# Altium PCB New PCB Design.PcbDoc
Units mil, origin at the board's own origin, x right, y up, seen from the top; angles counter-clockwise.
Board outline 6000 x 4000 mil, 2 copper layers (Top Layer, Bottom Layer); 36 components, 22 nets, 139 pads, 0 vias.
Unrouted connection lines stored in the file: 84.
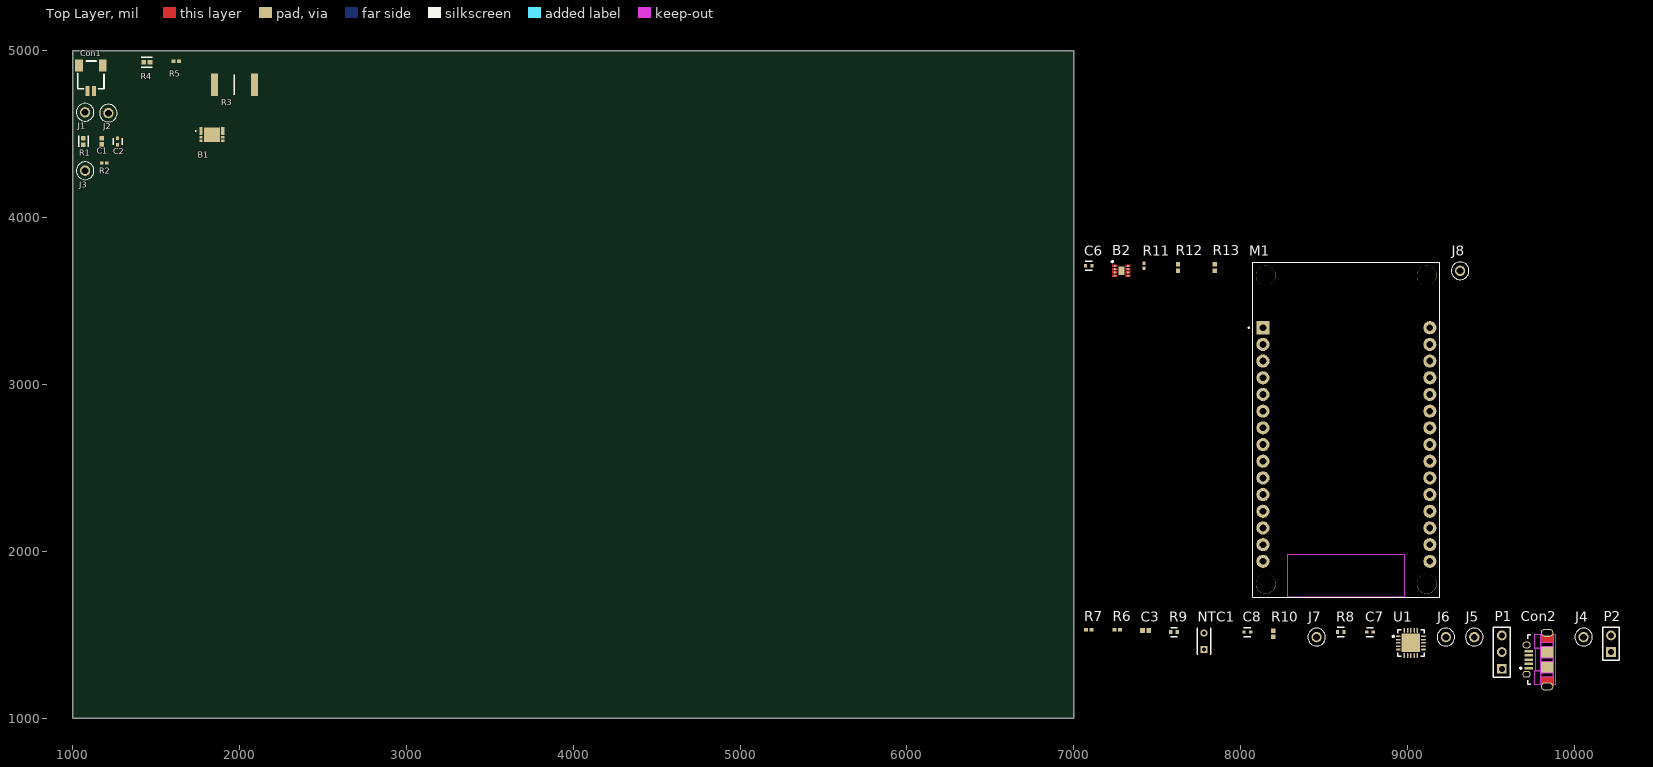
[diagram p0: Top Layer view]
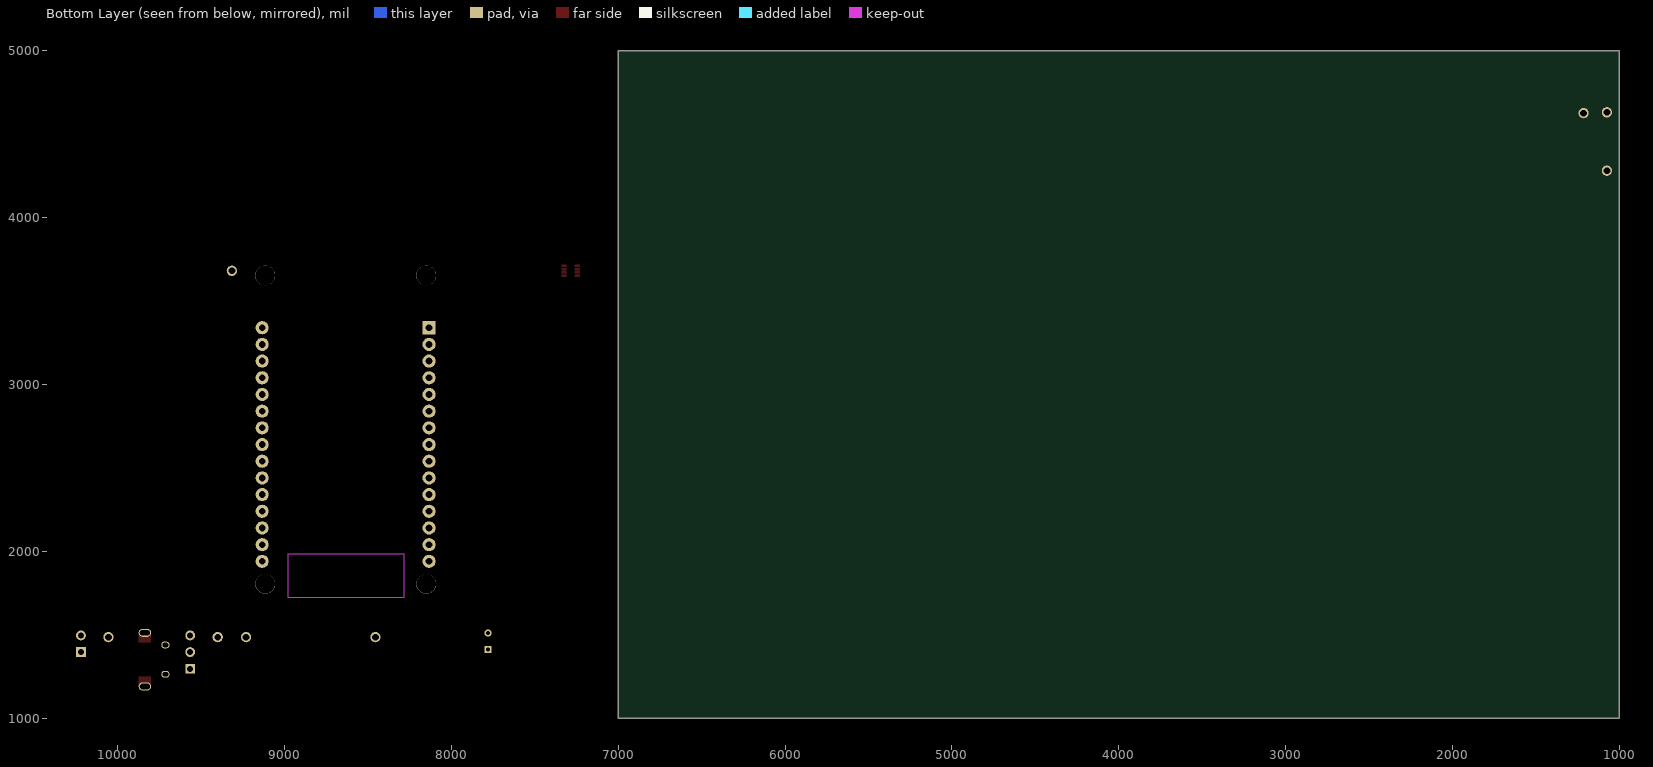
[diagram p1: Bottom Layer view, seen from below]

## Layer stack, top to bottom
Top Solder: solder mask 0.4, Solder Resist, Dk 3.5
Top Layer: signal copper 1.4
Dielectric 1: dielectric 12.6, FR-4, Dk 4.8
Bottom Layer: signal copper 1.4
Bottom Solder: solder mask 0.4, Solder Resist, Dk 3.5

## Board outline
1000,1000 7000,1000 7000,5000 1000,5000

## Design rules (kind name [scope] priority, off if disabled: settings)
Clearance [All] p1: gap=10 ignorepadtopadclearanceinfootprint=FALSE except(0: Arc-Hole Track-Hole SMDPad-Hole THPad-Hole Via-Hole Fill-Hole Poly-Hole Region-Hole Text-Hole)
PolygonConnect [All] p1: connectstyle=Relief reliefconductorwidth=10 reliefentries=4 polygonreliefangle="90 Angle" airgapwidth=10
RoomDefinition Battery_Monitor [InComponentClass('Battery_Monitor')] p1: confinementstyle=ConfineIn formatcopy=TRUE lockcomponents=FALSE outline 7045,1705 9385,1705 9385,3850 7045,3850
RoomDefinition Battery_Charger [InComponentClass('Battery_Charger')] p2: confinementstyle=ConfineIn formatcopy=TRUE lockcomponents=FALSE outline 7045,1060 10295,1060 10295,1655 7045,1655
RoutingVias [All] p1: holewidth=28 width=50 viastyle="Through Hole" minholewidth=28 minwidth=50 maxholewidth=28 maxwidth=50
SolderMaskExpansion [All] p1: expansion=4
Width "Schematic Width Constraint" [InNet('NetC3_2')] p1: maxlimit=36 minlimit=12 preferedwidth=20
Width "Schematic Width Constraint_9" [InNet('VBATT_2')] p2: maxlimit=36 minlimit=12 preferedwidth=20
Width "Schematic Width Constraint_7" [InNet('NetB1_3')] p3: maxlimit=36 minlimit=12 preferedwidth=20
Width "Schematic Width Constraint_6" [InNet('NetB1_1')] p4: maxlimit=36 minlimit=12 preferedwidth=20
Width "Schematic Width Constraint_5" [InNet('BATT+_1')] p5: maxlimit=36 minlimit=12 preferedwidth=20
Width "Schematic Width Constraint_4" [InNet('GND')] p6: maxlimit=36 minlimit=12 preferedwidth=20
Width "Schematic Width Constraint_3" [InNet('BATT+_1')] p7: maxlimit=36 minlimit=12 preferedwidth=20
Width "Schematic Width Constraint_2" [InNet('BATT-')] p8: maxlimit=36 minlimit=12 preferedwidth=20
Width [All] p9: maxlimit=10 minlimit=10 preferedwidth=10
30 further rules are at their usual default settings.

## Classes and differential pairs
component class Battery_Prtection: B1 C1 C2 Con1 J1 J2 J3 R1 R2 R3 R4 R5
component class Battery_Monitor: B2 C6 J8 M1 R11 R12 R13
component class Battery_Charger: C3 C7 C8 Con2 J4 J5 J6 J7 NTC1 P1 P2 R6 R7 R8 R9 R10 U1

## Components (designator, comment, footprint, x,y, rotation, side; value= is the part's Value field where it differs from the comment)
B1 "AP9214L-AH-HSB-7" AP9214LAHHSB7 1834.96,4495.75 r270 top
B2 "MAX17048G+T10" SON50P200X200X80-9N-D 7285,3680 r0 top
C1 "10uF" CAPC1005X70N 1175,4455 r270 top
C2 "0.1uF" FP-CC0402-MFG 1270,4455 r90 top
C3 "10uF" CAPC1005X70N 7430,1525 r0 top
C6 "0.1uF" FP-CC0402-MFG 7090,3710 r0 top
C7 "4.7 uF" FP-CC0402-MFG 8775,1515 r0 top
C8 "4.7 uF" FP-CC0402-MFG 8040,1515 r0 top
Con1 "SM02B-SRSS-TB(LF)(SN)" SM02B-SRSS-TB(LF)(SN) 1110,4835 r180 top
Con2 "ZX62D-AB-5P8" HIRO-ZX62D-AB-5P8_V 9775,1350 r90 top
J1 "5004" FP-5004-MFG 1075,4630 r0 top
J2 "5004" FP-5004-MFG 1215,4625 r0 top
J3 "5004" FP-5004-MFG 1075,4280 r0 top
J4 "5004" FP-5004-MFG 10055,1485 r0 top
J5 "5004" FP-5004-MFG 9400,1485 r0 top
J6 "5004" FP-5004-MFG 9230,1485 r0 top
J7 "5004" FP-5004-MFG 8455,1485 r0 top
J8 "5004" FP-5004-MFG 9315,3680 r0 top
M1 "ESP32-WROOM-32" ESP32-DEVKIT-V1 8610,2735 r0 top
NTC1 "NTC 10K Radial Leaded" FP-NXR_151B030-MFG 7780,1460 r90 top
P1 "Header 3" HDR1X3 9565,1295 r90 top
P2 "Header 2" HDR1X2 10220,1395 r90 top
R1 "0R" FP-RC0402-0_4-IPC_A 1065,4455 r90 top
R2 "402Ω" RESC1005X40X25LL05T10 1190,4325 r180 top value=402O
R3 "110mΩ" RESC6432X65N 1970,4795 r0 top value=110mO
R4 "0R" FP-RC0402-0_4-IPC_A 1445,4930 r0 top
R5 "2.61kΩ" RESC1005X40X25NL05T10 1621.73,4935 r0 top value=2.61kO
R6 "100K" RESC1005X40X25NL05T10 7260,1530 r0 top
R7 "2.61kΩ" RESC1005X40X25NL05T10 7090,1530 r0 top value=2.61kO
R8 "205Ω" FP-RT0402-MFG 8600,1515 r0 top value=205O
R9 "187kR" FP-AC0402-MFG 7600,1515 r0 top
R10 "2.2kR" RESC1005X40X25ML05T10 8195,1505 r90 top
R11 "10kR" RESC1005X40X25LL05T10 7420,3710 r90 top
R12 "2.2kR" RESC1005X40X25ML05T10 7625,3700 r90 top
R13 "2.2kR" RESC1005X40X25ML05T10 7845,3700 r90 top
U1 "MCP73871T-2CCI/ML" FP-C04-126-IPC_C 9020,1450 r0 top

## Footprints (in the part's own frame and the unit in brackets; to place one, negate y for a bottom-side part, rotate by r counter-clockwise, add the part's x,y. Pads: shape width x height; smd on the part's side, far side on the other; paste and mask are expansions set on the pad)
AP9214LAHHSB7 [mm]
  rect 1.2x0.5 smd: 1(-0.55,-1.65) 6(-0.55,1.65)
  rect 0.4x0.5 smd: 2(0.4,-1.65) 3(0.95,-1.65) 4(0.95,1.65) 5(0.4,1.65)
  rect 2.21x2.4 smd: 7(0,0)
  silkscreen extent -0.6,-2.5 -0.5,-2.4, body extent -1.25,-1.75 1.25,1.75, height 0.7
CAPC1005X70N [mm]
  rect 0.69x0.72 smd: 1(-0.46,0) 2(0.46,0)
  body extent -0.5,-0.25 0.5,0.25, height 0.7
ESP32-DEVKIT-V1 [mm]
  rect 2x2 hole 1.02: 1(-12.098,15.341)
  round 2 hole 1.02: 2(-12.098,12.801) 3(-12.098,10.261) 4(-12.098,7.721) 5(-12.098,5.181) 6(-12.098,2.641) 7(-12.098,0.101) 8(-12.098,-2.439) 9(-12.098,-4.979) 10(-12.098,-7.519) 11(-12.098,-10.059) 12(-12.098,-12.599) 13(-12.098,-15.139) 14(-12.098,-17.679) 15(-12.098,-20.219) 16(13.302,-20.219) 17(13.302,-17.679) 18(13.302,-15.139) 19(13.302,-12.599) 20(13.302,-10.059) 21(13.302,-7.519) 22(13.302,-4.979) 23(13.302,-2.439) 24(13.302,0.101) 25(13.302,2.641) 26(13.302,5.181) 27(13.302,7.721) 28(13.302,10.261) 29(13.302,12.801) 30(13.302,15.341)
  round 3 hole 3 unplated: ""(-11.678,-23.649) ""(-11.678,23.301) ""(12.832,-23.649) ""(12.832,23.301)
  Keep-Out Layer region: 9.382,-25.649 -8.308,-25.649 -8.308,-19.159 9.382,-19.159
  Keep-Out Layer region: 9.382,-25.649 -8.308,-25.649 -8.308,-19.159 9.382,-19.159
  Keep-Out Layer region: 9.382,-25.649 -8.308,-25.649 -8.308,-19.159 9.382,-19.159
  silkscreen extent -14.35,-25.65 14.83,25.3, body extent -13.5,-25.63 15,25.3, height 7.2
FP-5004-MFG [mm]
  round 1.57 hole 1.02 paste-1000 mask+0: 1(0,0)
  silkscreen extent -1.35,-1.34 1.35,1.34, body extent -1.45,-1.45 1.45,1.45, height 0.25
FP-AC0402-MFG [mm]
  rect 0.5x0.6 smd paste+0 mask+0: 1(-0.5,0) 2(0.5,0)
  silkscreen extent -0.5,-0.67 0.5,0.67, body extent -0.85,-0.4 0.85,0.4, height 0.25
FP-C04-126-IPC_C [mm]
  rect 0.729x0.239 smd paste+0 mask+0: 1(-1.915,1)
  rrect100% 0.729x0.239 smd paste+0 mask+0: 2(-1.915,0.5) 3(-1.915,0) 4(-1.915,-0.5) 5(-1.915,-1) 11(1.915,-1) 12(1.915,-0.5) 13(1.915,0) 14(1.915,0.5) 15(1.915,1)
  rrect100% 0.239x0.729 smd paste+0 mask+0: 6(-1,-1.915) 7(-0.5,-1.915) 8(0,-1.915) 9(0.5,-1.915) 10(1,-1.915) 16(1,1.915) 17(0.5,1.915) 18(0,1.915) 19(-0.5,1.915) 20(-1,1.915)
  rect 2.8x2.8 smd paste-1000 mask+0: 21(0,0)
  silkscreen extent -2.8,-2 2,2, body extent -2.38,-2.38 2.38,2.38, height 0.25
FP-CC0402-MFG [mm]
  rect 0.5x0.5 smd paste+0 mask+0: 1(-0.5,0) 2(0.5,0)
  silkscreen extent -0.53,-0.68 0.53,0.67, body extent -0.87,-0.48 0.87,0.48, height 0.25
FP-NXR_151B030-MFG [mm]
  rect 1.1x1.1 hole 0.6 paste-1000 mask+0: 1(-1.25,0)
  round 1.1 hole 0.6 paste-1000 mask+0: 2(1.25,0)
  silkscreen extent -2,-1 2,1, body extent -2.1,-1.1 2.1,1.1, height 0.25
FP-RC0402-0_4-IPC_A [mil]
  rect 28.16x26.48 smd paste+0 mask+0: 1(-18.84,0) 2(18.84,0)
  silkscreen extent -33,-29 33,29, body extent -41,-21 41,21, height 10
FP-RT0402-MFG [mm]
  rect 0.5x0.6 smd paste+0 mask+0: 1(-0.5,0) 2(0.5,0)
  silkscreen extent -0.5,-0.71 0.5,0.7, body extent -0.85,-0.4 0.85,0.4, height 0.25
HDR1X2 [mm] "Connector; Header; 2 Position"
  rect 1.5x1.5 hole 0.9: 1(0,0)
  round 1.5 hole 0.9: 2(2.54,0)
  silkscreen extent -1.27,-1.27 3.81,1.27
HDR1X3 [mm] "Connector; Header; 3 Position"
  rect 1.5x1.5 hole 0.9: 1(0,0)
  round 1.5 hole 0.9: 2(2.54,0) 3(5.08,0)
  silkscreen extent -1.27,-1.27 6.35,1.27
HIRO-ZX62D-AB-5P8_V [mm] "USB Micro-AB Connector, 5-Leads, Pitch 0.65mm"
  rect 0.4x1.35 smd: 1(-1.3,1.238) 2(-0.65,1.238) 3(0,1.238) 4(0.65,1.238) 5(1.3,1.238)
  oval 1.05x1.25 hole 0.65 slot 0.85 at 90 deg: 6(2.225,1.563) 11(-2.225,1.563)
  oval 1.225x1.9 hole 0.825 slot 1.5 at 90 deg: 7(4.088,-1.562) 10(-4.088,-1.562)
  rect 1.8x1.9 smd: 8(1.15,-1.562) 9(-1.15,-1.562)
  Top Layer region: -4.088,-2.513 -2.6,-2.513 -2.6,-0.613 -4.088,-0.613
  Top Layer region: 2.6,-2.513 4.088,-2.513 4.088,-0.613 2.6,-0.613
  Top Layer keep-out region: 2.59,-0.602 2.06,-0.602 2.06,-2.523 2.59,-2.523
  Top Layer keep-out region: -0.24,-2.522 0.24,-2.522 0.24,-0.602 -0.24,-0.602
  Top Layer keep-out region: -2.59,-2.523 -2.06,-2.523 -2.06,-0.602 -2.59,-0.602
  Top Layer keep-out region: -3.75,-2.887 3.75,-2.887 3.75,-2.522 -3.75,-2.522
  Top Layer keep-out region: 1.7,-0.602 3.75,-0.602 3.75,0.413 1.7,0.413
  Top Layer keep-out region: -1.7,-0.603 1.7,-0.603 1.7,0.213 -1.7,0.213
  Top Layer keep-out region: -3.75,-0.602 -1.7,-0.602 -1.7,0.413 -3.75,0.413
  silkscreen extent -3.75,0.91 3.75,2.59, body extent -4.37,-4.19 4.37,1.86, height 2.83
RESC1005X40X25LL05T10 [mm] "Chip Resistor, 2-Leads, Body 1.00x0.50mm, IPC High Density"
  rect 0.5x0.45 smd: 1(-0.375,0) 2(0.375,0)
  body extent -0.53,-0.27 0.53,0.28, height 0.4
RESC1005X40X25ML05T10 [mm] "Chip Resistor, 2-Leads, Body 1.00x0.50mm, IPC Low Density"
  rect 0.7x0.65 smd: 1(-0.475,0) 2(0.475,0)
  body extent -0.53,-0.27 0.53,0.28, height 0.4
RESC1005X40X25NL05T10 [mm] "Chip Resistor, 2-Leads, Body 1.00x0.50mm, IPC Medium Density"
  rect 0.6x0.55 smd: 1(-0.425,0) 2(0.425,0)
  body extent -0.53,-0.27 0.53,0.28, height 0.4
RESC6432X65N [mm]
  rect 1.1x3.4 smd: 1(-3.05,0) 2(3.05,0)
  silkscreen extent 0,-1.5 0,1.5, body extent -3.17,-1.6 3.17,1.6, height 0.65
SM02B-SRSS-TB(LF)(SN) [mm]
  rect 0.6x1.55 smd: 1(-0.5,1.975) 2(0.5,1.975)
  rect 1.2x1.8 smd: 3(-1.8,-1.9) 4(1.8,-1.9)
  silkscreen extent -2,-2.6 2,1.65, body extent -2,-2.47 2,2.48, height 2.95
SON50P200X200X80-9N-D [mm]
  round 0.3 smd: 1(-1,0.75) 2(-1,0.25) 3(-1,-0.25) 4(-1,-0.75) 5(1,-0.75) 6(1,-0.25) 7(1,0.25) 8(1,0.75)
  rect 0.9x1.3 smd: 9(0,0)
  Top Layer region: -1.375,0.9 -0.775,0.901 -0.736,0.896 -0.699,0.881 -0.668,0.857 -0.644,0.826 -0.629,0.789 -0.624,0.75 -0.629,0.711 -0.644,0.674 -0.668,0.643 -0.699,0.619 -0.736,0.604 -0.775,0.599 -0.775,0.6 -1.375,0.6 -1.375,0.9
  Top Layer region: -1.375,0.4 -0.775,0.401 -0.736,0.396 -0.699,0.381 -0.668,0.357 -0.644,0.326 -0.629,0.289 -0.624,0.25 -0.629,0.211 -0.644,0.174 -0.668,0.143 -0.699,0.119 -0.736,0.104 -0.775,0.099 -0.775,0.1 -1.375,0.1 -1.375,0.4
  Top Layer region: -1.375,-0.1 -0.775,-0.099 -0.736,-0.104 -0.699,-0.119 -0.668,-0.143 -0.644,-0.174 -0.629,-0.211 -0.624,-0.25 -0.629,-0.289 -0.644,-0.326 -0.668,-0.357 -0.699,-0.381 -0.736,-0.396 -0.775,-0.401 -0.775,-0.4 -1.375,-0.4 -1.375,-0.1
  Top Layer region: -1.375,-0.6 -0.775,-0.599 -0.736,-0.604 -0.699,-0.619 -0.668,-0.643 -0.644,-0.674 -0.629,-0.711 -0.624,-0.75 -0.629,-0.789 -0.644,-0.826 -0.668,-0.857 -0.699,-0.881 -0.736,-0.896 -0.775,-0.901 -0.775,-0.9 -1.375,-0.9 -1.375,-0.6
  Top Layer region: 1.375,-0.9 0.775,-0.901 0.736,-0.896 0.699,-0.881 0.668,-0.857 0.644,-0.826 0.629,-0.789 0.624,-0.75 0.629,-0.711 0.644,-0.674 0.668,-0.643 0.699,-0.619 0.736,-0.604 0.775,-0.599 0.775,-0.6 1.375,-0.6 1.375,-0.9
  Top Layer region: 1.375,-0.4 0.775,-0.401 0.736,-0.396 0.699,-0.381 0.668,-0.357 0.644,-0.326 0.629,-0.289 0.624,-0.25 0.629,-0.211 0.644,-0.174 0.668,-0.143 0.699,-0.119 0.736,-0.104 0.775,-0.099 0.775,-0.1 1.375,-0.1 1.375,-0.4
  Top Layer region: 1.375,0.1 0.775,0.099 0.736,0.104 0.699,0.119 0.668,0.143 0.644,0.174 0.629,0.211 0.624,0.25 0.629,0.289 0.644,0.326 0.668,0.357 0.699,0.381 0.736,0.396 0.775,0.401 0.775,0.4 1.375,0.4 1.375,0.1
  Top Layer region: 1.375,0.6 0.775,0.599 0.736,0.604 0.699,0.619 0.668,0.643 0.644,0.674 0.629,0.711 0.624,0.75 0.629,0.789 0.644,0.826 0.668,0.857 0.699,0.881 0.736,0.896 0.775,0.901 0.775,0.9 1.375,0.9 1.375,0.6
  silkscreen extent -1.5,1.28 -1.25,1.52, body extent -1.05,-1 1.05,1, height 0.8

## Part data
B1: "Battery Management Sgl Chip Sol 1-Cell 30V Li Battery Mgt", Manufacturer="Diodes Inc.", Mouser Part Number=621-AP9214L-AH-HSB-7, Package=U-DFN2535-6, Arrow Part Number=AP9214L-AH-HSB-7, Arrow Price/Stock=https://www.arrow.com/en/products/ap9214l-ah-hsb-7/diodes-incorporated, Datasheet Link=https://www.diodes.com/assets/Datasheets/AP9214L.pdf, Digi-Key Part #=AP9214L-AH-HSB-7DITR-ND,AP9214L-AH-HSB-7DICT-ND,AP9214L-AH-HSB-7DIDKR-ND, Geometry.Height=0.6mm, Mfr. Part #=AP9214L-AH-HSB-7, Mouser Price/Stock=https://www.mouser.co.uk/ProductDetail/Diodes-Incorporated/AP9214L-AH-HSB-7?qs=QGmEbV89MVMVPmL%2Fj7c%2FKQ%3D%3D
B2: "Battery Management Host-Side Modelgauge (1-Cell)", LCSC Part #=C2682616, Manufacturer="Maxim Integrated", Mouser Part Number=700-MAX17048G+T10, Package=TDFN-8_EP, Arrow Part Number=MAX17048G+T10, Arrow Price/Stock=https://www.arrow.com/en/products/max17048gt10/maxim-integrated?region=nac, Datasheet Link=https://datasheets.maximintegrated.com/en/ds/MAX17048-MAX17049.pdf, Digi-Key Part #=MAX17048G+T10TR-ND, Geometry.Height=0.8mm, Mfr. Part #=MAX17048G+T10, Mouser Price/Stock=https://www.mouser.co.uk/ProductDetail/Maxim-Integrated/MAX17048G%2bT10?qs=D7PJwyCwLAoGnnn8jEPRBQ%3D%3D
C1 C3: library part CL05A106MQ5NUNC, "CAP CER 10UF 6.3V X5R 0402", LCSC Part #=C15525, Manufacturer="Samsung Electro-Mechanics", Mouser Part Number=187-CL05A106MQ5NUNC, Package=0402, Arrow Part Number=CL05A106MQ5NUNC, Arrow Price/Stock=https://www.arrow.com/en/products/cl05a106mq5nunc/samsung-electro-mechanics?region=nac, Datasheet Link=https://datasheet.datasheetarchive.com/originals/distributors/Datasheets-DGA10/2406160.pdf, Digi-Key Part #=1276-1451-2-ND, Geometry.Height=0.7mm, Mfr. Part #=CL05A106MQ5NUNC, Mouser Price/Stock=https://www.mouser.co.uk/ProductDetail/Samsung-Electro-Mechanics/CL05A106MQ5NUNC?qs=X6jEic%2FHinDK8vVLi1zwpw%3D%3D
C2 C6: library part CMP-03422-000773-1, "CAP CER 0.1UF 16V X5R 0402", Capacitance="100 nF", LCSC Part #=C106204, Manufacturer=YAGEO, Mfr. Part #=CC0402KRX5R7BB104, Package=CC0402, Temperature="-55°C to +125°C", Temperature Characteristic=X5R, Temperature Coefficient=30ppm/°C, Temperature Range High=+125°C, Temperature Range Low=-55°C, Tolerance=0.1, Voltage Rating="16 V", Automotive=No, Automotive Grade=NA, Category=Cap, ComponentLink2Description=Datasheet, ComponentLink2URL=http://www.yageo.com/documents/recent/UPY-GP_NP0_16V-to-50V_16.pdf, Device Class L1="Passive Components", Device Class L2=Capacitors, Device Class L3="Ceramic Capacitors", Digi-Key Part #=311-1347-2-ND, Digikey Description="CAP CER 0.1UF 16V X5R 0402", Footprint Url=http://www.yageo.com/exep/pages/download/literatures/UPY-C_GEN_24.pdf, Height=0.55mm, Ipc Land Pattern Name=CAPC10050X50, Lead Free=Yes, Material=Ceramic, Mouser Description="Multilayer Ceramic Capacitors MLCC - SMD/SMT 100nF 16V X5R 10%", Octopart=https://octopart.com/cc0402krx5r7bb104-yageo-8376508, RoHS=TRUE
C7 C8: library part CMP-1034-02137-2, "CAP CER 4.7UF 6.3V X5R 0402", LCSC Part #=C106859, Manufacturer=YAGEO, Mfr. Part #=CC0402MRX5R5BB475, Package=CC0402, Temperature="-55°C to +125°C", Temperature Characteristic=X5R, Temperature Coefficient=30ppm/°C, Temperature Range High=+125°C, Temperature Range Low=-55°C, Tolerance=0.2, Voltage Rating="6.3 V", Automotive=No, Automotive Grade=NA, Capacitance="4.7 uF", Category=Cap, ComponentLink2Description=Datasheet, ComponentLink2URL=http://www.yageo.com/documents/recent/UPY-GP_NP0_16V-to-50V_16.pdf, Device Class L1="Passive Components", Device Class L2=Capacitors, Device Class L3="Ceramic Capacitors", Digi-Key Part #=311-1730-2-ND, Digikey Description="CAP CER 4.7UF 6.3V X5R 0402", Footprint Url=http://www.yageo.com/exep/pages/download/literatures/UPY-C_GEN_24.pdf, Height=0.55mm, Ipc Land Pattern Name=CAPC10050X50, Lead Free=Yes, Material=Ceramic, Mouser Description="Multilayer Ceramic Capacitors MLCC - SMD/SMT 4.7uF 6.3V X5R 20%", Octopart=https://octopart.com/cc0402mrx5r5bb475-yageo-20021081, RoHS=TRUE
Con1: "Connector Header Surface Mount, Right Angle 2 position 0.039 _1.00mm_", LCSC Part #=C160402, Manufacturer="JST Sales America", Package=None, Availability=Unavailable, Digi-Key Part #=455-1802-1-ND, MF="JST Sales", Mfr. Part #=SM02B-SRSS-TB(LF)(SN), MP=SM02B-SRSS-TB_LF__SN_, Price=None, SnapEDA_Link=https://www.snapeda.com/parts/SM02B-SRSS-TB%28LF%29%28SN%29/JST%20Sales%20America%20Inc./view-part/447499/?ref=snap
Con2: library part CMP-1349-00001-2, "USB 2.0 Standard Micro-USB Connector, Micro AB-Standard (Bottom Mount), 30 V AC, -30 to 85 degC, Right Angle, 5-Pin 7.5 x 5.6 x 2.8 mm SMD, RoHS, Reel", Capacitance="2 pF Max.", Contact Resistance="30 mOhm Max.", LCSC Part #=C598206, Manufacturer="Hirose Electric", Mfr. Part #=ZX62D-AB-5P8(30), Operating Temperature Range="-30 to 85 degC", Package=SMD, Voltage Rating="30 V AC", ComponentLink1Description="Manufacturer URL", ComponentLink1URL=http://www.hirose.com/, ComponentLink2Description=Datasheet, ComponentLink2URL=http://www.hirose.co.jp/cataloge_hp/ed_ZX_20140804.pdf, ComponentLink3Description="Package Specification", ComponentLink3URL=http://www.hirose.co.jp/cataloge_hp/ed_ZX_20140804.pdf, DatasheetVersion=Aug-14, Digi-Key Part #=H125271TR-ND, Mounting Technology="Surface Mount", Number of Contacts=5, PackageDescription="USB Micro-AB Connector, Right Angle, Body 7.5 x 5.6 mm, Pitch 0.65 mm, Height 2.8 mm", Packing=Reel, RoHS=TRUE
J1 J2 J3 J4 J5 J6 J7 J8: library part CMP-2000-05575-2, "PC TEST POINT MINIATURE YELLOW", LCSC Part #=C2906762, Manufacturer=Keystone, Automotive=No, Category=Conn, ComponentLink2Description=Datasheet, ComponentLink2URL=https://www.keyelco.com/product-pdf.cfm?p=1313, Contact Material=Silver, Device Class L1=Connectors, Device Class L2=unset, Device Class L3=unset, Digi-Key Part #=36-5004-ND, Digikey Description="PC TEST POINT MINIATURE YELLOW", Height=4.72mm, Is Female=yes, Lead Free=Yes, Mfr. Part #=5004, Mouser Description="TEST POINT PC MINI .040\"D YELLOW", Number of Contacts=1, Octopart=https://octopart.com/5004-keystone-28591, Package=5004, RoHS=TRUE
M1: library part ESP32-DEVKIT-V1, "Dual core, Wi-Fi: 2.4 GHz up to 150 Mbits/s,BLE (Bluetooth Low Energy) and legacy Bluetooth, 32 bits, Up to 240 MHz"
NTC1: library part CMP-06022-001050-1, "NTC Thermistors ±1% 7.5mW 3380K ±1% 10kO Radial Leaded NTC Thermistors ROHS", LCSC Part #=C152559, Manufacturer="Murata Electronics", Max Operating Temperature=125°C, Max Power Dissipation=7.5mW, Mfr. Part #=NXRT15XH103FA1B030, Min Operating Temperature=-40°C, Package Quantity=500, Resistance=10kR, Resistance in Ohms @ 25°C=10K, Resistance Tolerance=1%, B-Constant=3380K, Datasheet=https://datasheet.lcsc.com/lcsc/1810170223_Murata-Electronics-NXRT15XH103FA1B030_C152559.pdf, Digi-Key Part #=490-8601-ND, Height=2mm, Lead Diameter=0.4mm, Lead Free="Lead Free", Lead Pitch=2.5mm, Length=5mm, Mount="Through Hole", Number of Pins=2, Packaging=Bulk, Power Rating=7.5mW, RoHS Compliant=Yes, Series=NXR, Termination=Radial, Tolerance=1%, Width=4mm
P1: "Header, 3-Pin", LatestRevisionDate=17-Jul-2002, LatestRevisionNote="Re-released for DXP Platform.", Publisher="Altium Limited"
P2: "Header, 2-Pin", LatestRevisionDate=17-Jul-2002, LatestRevisionNote="Re-released for DXP Platform.", Publisher="Altium Limited"
R1 R4: library part CMP-2002-07342-2, "RES SMD 0 OHM JUMPER 1/16W 0402", Case Code (Imperial)=0402, Case Code (Metric)=1005, LCSC Part #=C106231, Manufacturer=YAGEO, Max Operating Temperature=155°C, Max Power Dissipation=63mW, Mfr. Part #=RC0402FR-070RL, Min Operating Temperature=-55°C, Power Rating=62.5mW, Resistor Type="Thick Film", Temperature Coefficient=200ppm/°C, Tolerance=1%, Voltage Rating=50V, Contact Plating=Tin, Digi-Key Part #=311-0.0LRTR-ND, Features="Moisture Resistant", Height=0.35mm, Lead Free="Lead Free", Length=1mm, Mount="Surface Mount", Number of Terminations=2, Package=0402, Packaging="Tape and Reel", Radiation Hardening=No, Resistance=0R, RoHS Compliant=Yes, Series=RC, Size Code=0402, Termination=SMD/SMT, Width=0.5mm
R2: library part CMP-2002-07675-1, "50V -55?~+155? ±1% 402O Thick Film Resistors 62.5mW ±100ppm/? 0402 Chip Resistor - Surface Mount ROHS", LCSC Part #=C137984, Manufacturer=Yageo, Mfr. Part #=RC0402FR-07402RL, Package=0402, Digi-Key Part #=YAG3152TR-ND
R3: library part RL2512FK-070R11L, "Res Thick Film 2512 0.11 Ohm 1% 1W +/-600ppm/C Epoxy Pad SMD Automotive T/R", LCSC Part #=C876467, Manufacturer=KEMET, Mouser Part Number=603-RL2512FK-070R11L, Package=2512, Arrow Part Number=RL2512FK-070R11L, Arrow Price/Stock=https://www.arrow.com/en/products/rl2512fk-070r11l/yageo, Datasheet Link=https://www.yageo.com/upload/media/product/productsearch/datasheet/rchip/PYu-RL_Group_521_RoHS_L_2.pdf, Digi-Key Part #=311-0.11TTR-ND, Geometry.Height=0.65mm, Mfr. Part #=RL2512FK-070R11L, Mouser Price/Stock=https://www.mouser.co.uk/ProductDetail/Yageo/RL2512FK-070R11L/?qs=x8mT8l3Qr1Hhdc7K4N9hZA%3D%3D
R5 R7: library part CMP-2002-07573-1, "62.5mW Thick Film Resistors 50V ±100ppm/? ±1% -55?~+155? 2.61kO 0402 Chip Resistor - Surface Mount ROHS", LCSC Part #=C163472, Manufacturer="Yageo / Phycomp", Mfr. Part #=RC0402FR-072K61L, Package=0402, Tolerance=±1%, Digi-Key Part #=YAG3103TR-ND
R6: library part CMP-2002-07343-1, "100K ±1% 1/16W 0402 Chip Resistor - Surface Mount RoHS", LCSC Part #=Tolerance, Manufacturer="Yageo / Phycomp", Mfr. Part #=RC0402FR-07100KL, Package=0402, Power (Watts)=1/16W, Tolerance=±1%, Digi-Key Part #=311-100KLRTR-ND, Resistance=100K
R8: library part CMP-03412-026788-1, "205O 50V ±50ppm/? -55?~+155? ±1% Thin Film Resistor 62.5mW 0402 Chip Resistor - Surface Mount ROHS", LCSC Part #=C327014, Manufacturer=Yageo, Mfr. Part #=RT0402FRE07205RL, Package=RT0402, Power Rating=0.063W, Resistance=205O, Temperature="-55°C to +155°C", Temperature Coefficient="50 ppm/°C", Temperature Range High=+155°C, Temperature Range Low=-55°C, Tolerance=0.01, Voltage Rating=50V, Automotive=No, Category=Res, ComponentLink2Description=Datasheet, ComponentLink2URL=http://www.yageo.com/documents/recent/PYu-RT_1-to-0.01_RoHS_L_9.pdf, Composition="Thin Film", Device Class L1="Passive Components", Device Class L2=Resistors, Device Class L3="Chip SMD Resistors", Digi-Key Part #=RT0402FRE07205RL-ND, Digikey Description="RES SMD 205 OHM 1% 1/16W 0402", Footprint Url=http://www.yageo.com/exep/pages/download/literatures/PYu-R_Mount_10.pdf, Height=0.35mm, Ipc Land Pattern Name=RESC10050X30, Lead Free=Yes, Octopart=https://octopart.com/rt0402fre07205rl-yageo-1208039, RoHS=TRUE, Series=RT
R9: library part CMP-03412-002180-2, "187kO ±1% -55?~+155? 50V Thick Film Resistors 62.5mW ±100ppm/? 0402 Chip Resistor - Surface Mount ROHS", LCSC Part #=C226824, Manufacturer=YAGEO, Max Operating Temperature=155°C, Max Power Dissipation=63mW, Mfr. Part #=AC0402FR-07187KL, Min Operating Temperature=-55°C, Package=0402, Resistor Type="Thick Film", Temperature Coefficient=100ppm/°C, Tolerance=1%, Digi-Key Part #=13-AC0402FR-07187KLTR-ND, Features="Moisture Resistant", Height=0.015inch, Length=0.039inch, Number of Terminations=2, Packaging="Tape and Reel", Resistance=187kR, RoHS Compliant=Yes, Series=AC, Width=0.02inch
R10 R12 R13: library part CMP-2002-07567-1, "62.5mW Thick Film Resistors 50V ±100ppm/? ±1% -55?~+155? 2.2kO 0402 Chip Resistor - Surface Mount ROHS", LCSC Part #=C114762, Manufacturer="Yageo / Phycomp", Mfr. Part #=RC0402FR-072K2L, Package=0402, Power (Watts)=63mW, Tolerance=1%, Digi-Key Part #=311-2.20KLRTR-ND
R11: library part CMP-2002-07353-1, "50V 10kO Thick Film Resistors 62.5mW ±1% -55?~+155? ±100ppm/? 0402 Chip Resistor - Surface Mount ROHS", LCSC Part #=C60490, Manufacturer="Yageo / Phycomp", Mfr. Part #=RC0402FR-0710KL, Package=0402, Power (Watts)=62.5mW, Tolerance=1%, Digi-Key Part #=311-10.0KLRTR-ND
U1: library part CMP-06318-000014-1, "IC USB/AC BATT CHRGR W/PPM 20QFN", Case/Package=QFN, Manufacturer="Microchip Technology", Max Operating Temperature=85°C, Max Supply Voltage=6V, Mfr. Part # (Alternative)=MCP73871-2CCI/ML, Min Operating Temperature=-40°C, Min Supply Voltage=4.5V, Output Current=1A, Output Voltage=4.2V, Package=QFN-20(4x4), Package Quantity=3300, Contact Plating=Tin, Digi-Key Part #=MCP73871T-2CCI/MLTR-ND, Lead Free="Lead Free", Mfr. Part #=MCP73871T-2CCI/ML, Mount="Surface Mount", Number of Pins=20, Packaging="Tape and Reel", RoHS Compliant=Yes

## Nets (pads, with @x,y where several pads share a name; then routed paths per layer and width w, separated by ;. In a path a pad name is that pad's centre, name@x,y a point inside that pad or via, vN(x,y) a via of type N, cw(c..) or ccw(c..) an arc to the next point about the centre after c; other vN are vias at no path point)
3.3V: M1.1 R10.2 R11.2 R12.2 R13.2
ALRT: B2.5 J8.1 M1.25 R11.1
BATT+: Con1.2 J1.1 R1.2
BATT+_1: B2.2 B2.3 C1.2 C6.1 C8.1 J3.1 R1.1 R2.2 U1.14 U1.15 U1.16
BATT-: B1.2 C1.1 C2.2 Con1.1 J2.1 R3.1 R4.2
BATT_CHG: J5.1 R10.1 U1.8
GND: B1.6 B2.1 B2.4 B2.6 B2.9 C3.1 C6.2 C7.2 C8.2 Con2.5 Con2.6 Con2.7 Con2.8 Con2.9 Con2.10 Con2.11 J6.1 M1.2 M1.29 NTC1.1 P2.2 R4.1 R5.1 R6.1 R7.1 R9.1 U1.3 U1.9 U1.10 U1.11 U1.21
NetB1_1: B1.1 R3.2
NetB1_3: B1.3 C2.1 R2.1
NetB1_4: B1.4 R5.2
NetB2_7: B2.7 M1.14 R12.1
NetB2_8: B2.8 M1.11 R13.1
NetC3_2: C3.2 Con2.1 U1.2 U1.4 U1.17 U1.18 U1.19
NetCon2_2: Con2.2 P1.3
NetCon2_3: Con2.3 P1.2
NetCon2_4: Con2.4 P1.1
NetLabel9: M1.20
NetR6_2: R6.2 U1.12
NetR7_2: R7.2 U1.13
NetR8_1: R8.1 U1.5
TEMP: J7.1 NTC1.2 R8.2 R9.2
VBATT_2: C7.1 J4.1 P2.1 U1.1 U1.20
pads on no net: B1.5 B1.7 Con1.3 Con1.4 M1. M1.3 M1.4 M1.5 M1.6 M1.7 M1.8 M1.9 M1.10 M1.12 M1.13 M1.15 M1.16 M1.17 M1.18 M1.19 M1.21 M1.22 M1.23 M1.24 M1.26 M1.27 M1.28 M1.30 U1.6 U1.7

## Text inside footprints (layer, text, board x,y; h text height)
Con2: Bottom Assembly "board edge" at 9890,1070 h7.87 r90